# EAGLE board dosimeter (EAGLE 6.1)
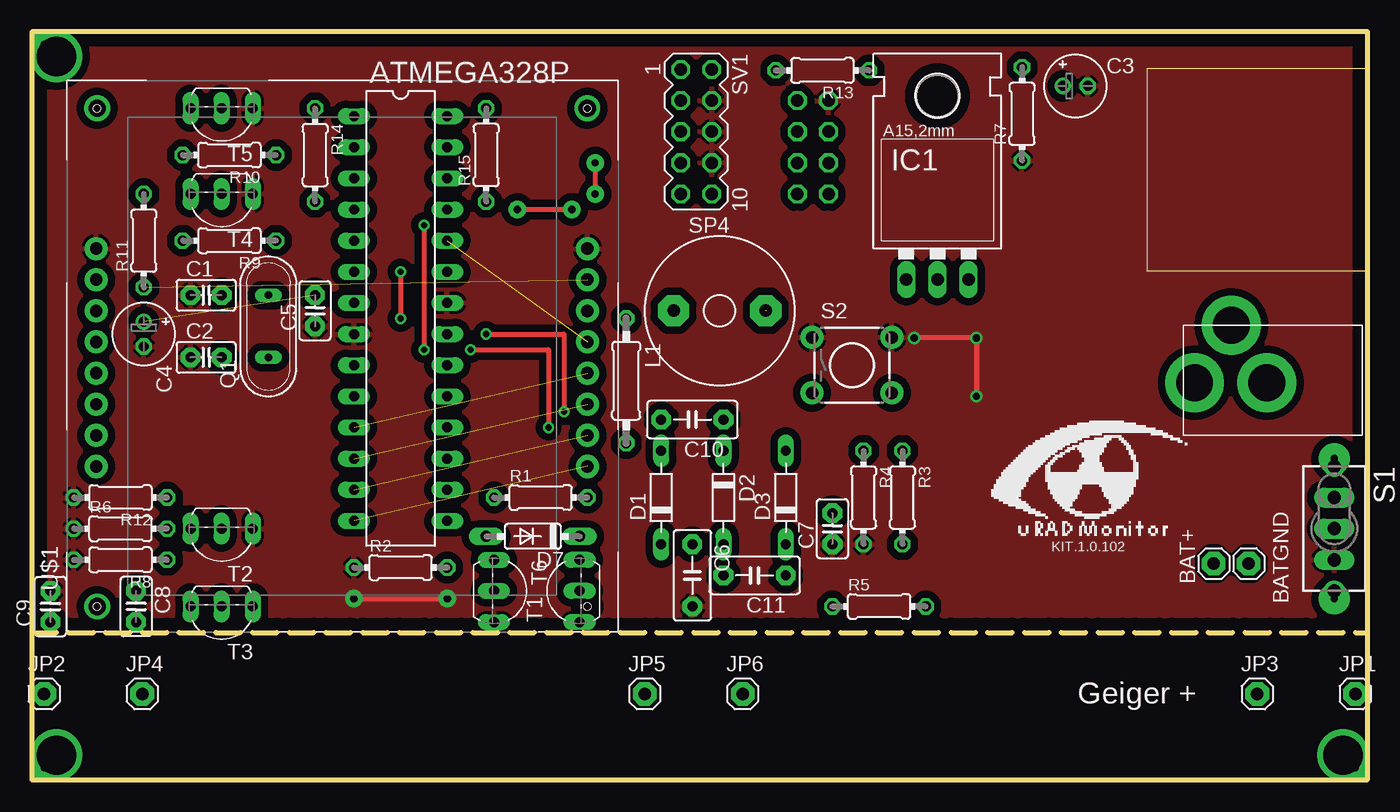
[diagram p0: board, top side]
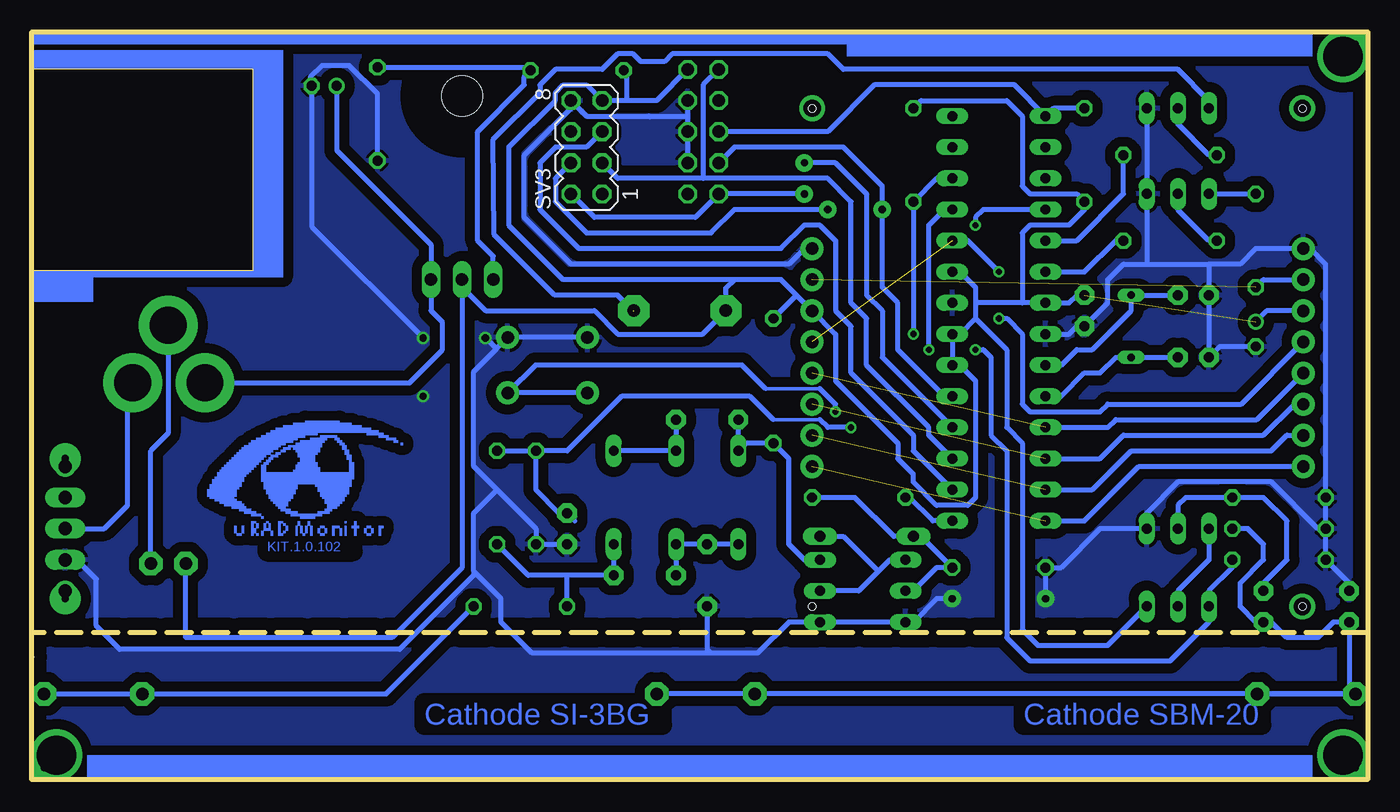
[diagram p1: board, bottom side, seen from below]

Size 109 x 61 mm. Coordinates in mm from the lower left corner, seen from the top.
Outline: 109,10 109,0 0,0 0,12
Outline: 109,10 109,12
Outline: 109,12 109,61 0,61 0,12
Outline: 0,12 109,12
Outline: 109,10 109,12
Copper layers (1*16): Top 0.035mm / dielectric 1.5mm / Bottom 0.035mm
Design rules: minimum track width 10mil, minimum drill 24mil, track to track 8mil, track to pad 8mil, pad to pad 8mil, via to via 8mil, smd to smd 8mil, copper to edge 40mil, drill to drill 8mil, minimum pad ring 10mil, minimum via ring 8mil, stop-mask expansion 4mil, vias tented up to drill 0mil, thermal gap 10mil
Milling: area 91,41.5 to 109,58

## Footprints (pad centres in the part's own frame; a part is rotated, then mirrored left to right if it is on the bottom)
DIL28-3 = drill 0.813 long: 1 -16.51,-3.81; 2 -13.97,-3.81; 3 -11.43,-3.81; 4 -8.89,-3.81; 5 -6.35,-3.81; 6 -3.81,-3.81; 7 -1.27,-3.81; 8 1.27,-3.81; 9 3.81,-3.81; 10 6.35,-3.81; 11 8.89,-3.81; 12 11.43,-3.81; 13 13.97,-3.81; 14 16.51,-3.81; 15 16.51,3.81; 16 13.97,3.81; 17 11.43,3.81; 18 8.89,3.81; 19 6.35,3.81; 20 3.81,3.81; 21 1.27,3.81; 22 -1.27,3.81; 23 -3.81,3.81; 24 -6.35,3.81; 25 -8.89,3.81; 26 -11.43,3.81; 27 -13.97,3.81; 28 -16.51,3.81
1X01 = drill 1.016 pad 1.93 octagon: 1 0,0
C2.5-2 = drill 0.813 pad 1.6 octagon: 1 -1.27,0; 2 1.27,0
E2-5 = drill 0.813 pad 1.27: + -1.016,0 | drill 0.813 pad 1.27 octagon: - 1.016,0
C5B3 = drill 0.813 pad 1.6 octagon: 1 -2.54,0; 2 2.54,0
D-7.5 = drill 0.813 long: A 3.81,0; C -3.81,0
DO35-7 = drill 0.9 long: A 3.81,0; C -3.81,0
317TL = drill 1.016 long: 1 -2.54,-3.81; 2 0,-3.81; 3 2.54,-3.81 | hole 3.302: 0,11.176
0207/10 = drill 0.813 octagon: 1 -5.08,0; 2 5.08,0
QS = drill 0.61 long: 1 -2.54,0; 2 2.54,0
0204/7 = drill 0.813 octagon: 1 -3.81,0; 2 3.81,0
TL3XYO = drill 1.1 pad 1.422 long: 1 -2.54,0; 2 0,0; 3 2.54,0 | drill 1.1 pad 1.676: M1 -5.08,0; M2 5.08,0
TACTILE-PTH = drill 1.016 pad 1.88: 1 -3.251,2.261; 2 3.251,2.261; 3 -3.251,-2.261; 4 3.251,-2.261
AL60P = drill 1.016 pad 2.54 octagon: 1 -3.759,0; 2 3.759,0
MA05-2 = drill 1.016 octagon: 1 -5.08,-1.27; 2 -5.08,1.27; 3 -2.54,-1.27; 4 -2.54,1.27; 5 0,-1.27; 6 0,1.27; 7 2.54,-1.27; 8 2.54,1.27; 9 5.08,-1.27; 10 5.08,1.27
MA04-2 = drill 1.016 octagon: 1 -3.81,-1.27; 2 -3.81,1.27; 3 -1.27,-1.27; 4 -1.27,1.27; 5 1.27,-1.27; 6 1.27,1.27; 7 3.81,-1.27; 8 3.81,1.27
TO92-EBC-OVAL = drill 0.813 long: B 0,-1.27; C 2.54,-1.27; E -2.54,-1.27
TO92-EBC = drill 0.813 long: B 0,-1.27; C 2.54,-1.27; E -2.54,-1.27
NOKIA5110 = drill 1.016 pad 1.88: B1 -0.01,0; B2 2.53,0; B3 5.07,0; B4 7.61,0; B5 10.15,0; B6 12.69,0; B7 15.23,0; B8 17.77,0; T1 -0.01,40.08; T2 2.53,40.08; T3 5.07,40.08; T4 7.61,40.08; T5 10.15,40.08; T6 12.69,40.08; T7 15.23,40.08; T8 17.77,40.08 | hole 0.6: -11.43,0; 29.21,0; -11.43,40.005; 29.21,40.005
PJ-102A = drill 3 pad 4.8: RING 0.1,-3.39; RING_SW -4.6,-6.29; TIP 0.1,-9.29

## Placement (x,y rotation side)
ATMEGA328P  ATMEGA328P  [DIL28-3]  30.09,37.62 270 top
BAT+  [1X01]  96.44,17.62 0 top
BATGND  [1X01]  99.3,17.62 0 top
C1  33p  [C2.5-2]  14.21,39.53 0 top
C2  33p  [C2.5-2]  14.21,34.45 0 top
C3  22uF 50V  [E2-5]  85.15,56.59 0 top
C4  47uF 16V  [E2-5]  9.13,36.35 270 top
C5  100nF  [C2.5-2]  23.1,38.26 90 top
C6  10nF/1KV  [C5B3]  53.9,16.67 270 top
C7  15nF  [C2.5-2]  65.33,20.48 90 top
C8  33p  [C2.5-2]  8.49,14.13 270 top
C9  33pF  [C2.5-2]  1.51,14.13 90 top
C10  10nF/1KV  [C5B3]  53.9,29.37 180 top
C11  10nF/1KV  [C5B3]  58.98,16.67 180 top
D1  BYV26E  [D-7.5]  51.36,23.02 90 top
D2  BYV26E  [D-7.5]  56.44,23.02 270 top
D3  BYV26E  [D-7.5]  61.52,23.02 90 top
D7  1N4148DO35-7  [DO35-7]  40.88,19.84 180 top
IC1  [317TL]  73.9,44.61 0 top
JP1  [1X01]  108,7 0 top
JP2  [1X01]  1,7 0 top
JP3  [1X01]  100,7 0 top
JP4  [1X01]  9,7 0 top
JP5  [1X01]  50,7 0 top
JP6  [1X01]  58,7 0 top
L1  2.2mH  [0207/10]  48.5,32.55 270 top
Q1  8Mhz  [QS]  19.29,36.99 90 top
R1  100  [0204/7]  41.52,23.02 0 top
R2  10K  [0204/7]  30.09,17.3 0 top
R3  10M 1%  [0204/7]  71.04,23.02 270 top
R4  47K 1%  [0204/7]  67.87,23.02 270 top
R5  10M  [0204/7]  69.14,14.13 0 top
R6  220K  [0204/7]  7.23,20.48 0 top
R7  3K  [0204/7]  80.8,54.32 90 top
R8  10K  [0204/7]  7.23,17.94 180 top
R9  100  [0204/7]  16.11,43.97 180 top
R10  100  [0204/7]  16.11,50.96 180 top
R11  100  [0204/7]  9.13,43.97 90 top
R12  100K  [0204/7]  7.23,23.02 180 top
R13  2.2K  [0204/7]  64.51,57.86 180 top
R14  10K  [0204/7]  23.1,50.96 270 top
R15  10K  [0204/7]  37.07,50.96 90 top
S1  TL32YO  [TL3XYO]  106.28,20.48 270 top
S2  [TACTILE-PTH]  66.92,33.81 0 top
SP4  SPEAKER/AL60P  [AL60P]  56.12,38.26 0 top
SV1  isp  [MA05-2]  54.21,52.86 270 top
SV3  ethernet  [MA04-2]  63.74,51.59 90 bottom
T1  MPSA42  [TO92-EBC-OVAL]  43.42,15.4 90 top
T2  2N2222  [TO92-EBC-OVAL]  15.48,19.21 180 top
T3  2N2907  [TO92-EBC-OVAL]  15.48,12.86 180 top
T4  2n2222  [TO92-EBC]  15.48,46.52 180 top
T5  2n2222  [TO92-EBC]  15.48,53.5 180 top
T6  2N2907  [TO92-EBC-OVAL]  38.98,15.4 270 top
U$1  NOKIA5110  [NOKIA5110]  45.33,25.56 90 top
U$2  2.1MMJACKTHM  [PJ-102A]  104.17,32.48 270 top

## Library data of the parts
ATMEGA328P = atmel; OC_FARNELL: unknown; OC_NEWARK: unknown
BAT+ BATGND JP1-JP6 SP4 T1-T3 T6 U$2 = adafruit
C1 C2 C5-C11 = capacitor-wima
C3 C4 = resistor
D1-D3 = diode
D7 = Diode2
IC1 = v-reg
L1 R1-R15 = rcl
Q1 = special
S1 = switch
S2 = sparkfun-electromechanical
SV1 SV3 = con-lstb; OC_FARNELL: unknown; OC_NEWARK: unknown
T4 T5 = transistor-neu-to92
U$1 = NOKIA5110_OK

## Nets
GND: ATMEGA328P.8 ATMEGA328P.22 C1.1 C2.1 C3.- C4.- C5.1 C6.2 C7.1 C9.2 R2.1 R4.2 R6.1 R7.1 R8.2 R12.2 S1.3 S2.1 S2.2 SV1.4 SV1.6 SV1.8 SV3.8 T1.E T2.E T4.E T5.E T6.C U$1.B8 U$1.T8
N$1: ATMEGA328P.9 C1.2 Q1.2
N$2: ATMEGA328P.10 C2.2 Q1.1
N$3: R11.2 T4.C
N$4: ATMEGA328P.17 SV1.1 SV3.3
N$5: ATMEGA328P.16 SV3.5
N$6: ATMEGA328P.18 SV1.9 SV3.2
N$7: R9.2 T4.B
N$8: ATMEGA328P.19 SV1.7 SV3.4
N$9: R11.1 U$1.B7 U$1.T7
N$10: C10.2 D1.A L1.2 T1.C
N$11: ATMEGA328P.1 R14.1 SV1.5
N$13: ATMEGA328P.24 U$1.B5 U$1.T5
N$14: ATMEGA328P.26 R15.1 S2.3 S2.4
N$15: S1.2 U$2.RING
N$16: C10.1 D2.C D3.A
N$18: JP1.1 JP3.1 R5.2
N$20: BATGND.1 U$2.RING_SW
N$21: ATMEGA328P.11 U$1.B4 U$1.T4
N$22: ATMEGA328P.12 U$1.B3 U$1.T3
N$23: ATMEGA328P.13 U$1.B2 U$1.T2
N$24: ATMEGA328P.14 U$1.B1 U$1.T1
N$25: ATMEGA328P.7 ATMEGA328P.20 ATMEGA328P.21 ATMEGA328P.23 BAT+.1 C4.+ C5.2 IC1.2 L1.1 R13.2 R14.2 R15.2 SP4.1 SV1.2 SV3.7 T3.E U$1.B6 U$1.T6
N$26: ATMEGA328P.15 R1.1
N$27: D7.A R1.2 R2.2 T6.B
N$28: C3.+ IC1.3 U$2.TIP
N$30: C6.1 C11.2 D1.C D2.A
N$31: C11.1 D3.C R3.2 R5.1
N$34: ATMEGA328P.6 R9.1
N$40: SP4.2 T5.C
N$41: R10.2 T5.B
N$42: ATMEGA328P.5 R10.1
N$48: IC1.1 R7.2 R13.1
N$52: C8.2 C9.1 JP2.1 JP4.1 JP5.1 JP6.1 R6.2
N$54: ATMEGA328P.25 C7.2 R3.1 R4.1
N$56: C8.1 R12.1 T2.B
N$59: T2.C T3.B
N$60: ATMEGA328P.4 R8.1 T3.C
N$74: D7.C T1.B T6.E

## Tracks (layer width: path | path; a pad name or v marks a point on that pad's centre or on a via)
GND  (via drill 0.6, 0.6 pad 1.42)
  Top 0.406: v26.27,14.77 v33.89,14.77 | v72,36.04 v77.08,36.04 v77.08,31.27
  Bottom 0.406: ATMEGA328P.8 24.37,36.35 23.73,36.99 C5.1 21.2,38.89 21.2,40.8 19.93,42.07 18.02,42.07 | T5.E T4.E 18.02,42.07 | 12.94,42.07 C1.1 C2.1 12.05,35.34 C4.- | 18.02,42.07 12.94,42.07 | SV1.4 55.48,54.13 | 55.48,54.13 SV1.6 SV1.8 | 58.66,54.13 63.74,54.13 SV3.8 65.01,54.77 68.82,50.96 68.82,45.88 65.01,42.07 47.23,42.07 45.97,43.33 U$1.B8 | 58.66,54.13 55.48,54.13 | 12.94,42.07 10.4,42.07 9.13,43.34 5.25,43.34 U$1.T8 4.69,43.34 3.42,42.07 R6.1 | C9.2 1.51,16.03 R8.2 R6.1 | R6.1 R12.2 | R6.1 4.05,20.48 7.86,24.29 15.48,24.29 18.02,21.75 T2.E 21.83,20.48 25,17.3 R2.1 v26.27,14.77 | 72.95,16.99 70.72,14.77 70.72,12.86 68.19,10.32 53.58,10.32 | C7.1 R4.2 67.87,20.48 71.04,23.65 | v33.89,14.77 35.16,14.77 37.07,12.86 T6.C T1.E 47.23,12.86 49.77,10.32 53.58,10.32 | 71.04,23.65 72.95,25.56 72.95,33.29 71.1,35.14 | 58.58,54.05 58.66,54.13 | C6.2 53.9,10.64 53.58,10.32 | 72.95,16.99 72.95,21.75 71.04,23.65 | 71.1,35.14 S2.2 | S2.1 70.05,36.08 70.09,36.04 | 72.95,16.99 72.95,16.67 78.98,10.64 101.84,10.64 103.75,12.54 103.75,16.35 105.33,17.94 S1.3 | R7.1 80.8,55.96 83.11,58.26 85.33,58.26 86.28,57.31 | C3.- 86.16,45.13 v77.08,36.04 | v72,36.04 71.1,35.14
  pour Top (isolate 0.61): 0,61 109,61 109,12 0,12
  pour Bottom (isolate 0.813): 0,61 109,61 109,0 0,0
N$1
  Bottom 0.406: C1.2 Q1.2 19.29,38.26 22.47,35.08 23.73,35.08 25,33.81 ATMEGA328P.9
N$2
  Bottom 0.406: C2.2 Q1.1 20.56,34.45 21.83,33.18 23.1,33.18 25,31.27 ATMEGA328P.10
N$3
  Bottom 0.406: T4.C R11.2
N$4
  Bottom 0.406: ATMEGA328P.17 35.8,28.1 35.8,28.73 40.88,33.81 40.88,37.62 42.15,38.89 42.15,47.15 44.06,49.05 54.21,49.05 | SV1.1 54.21,56.67 54.21,49.05 | 54.21,49.05 61.2,49.05 SV3.3
N$5
  Bottom 0.406: SV3.5 63.74,51.59 66.28,51.59 67.55,50.32 67.55,46.52 64.38,43.34 47.87,43.34 45.96,45.24 44.69,45.24 43.42,43.97 43.42,38.26 42.15,36.99 42.15,33.18 37.07,28.1 37.07,26.83 ATMEGA328P.16 34.53,23.65
N$6  (via drill 0.6 pad 1.42)
  Top 0.406: v45.96,50.32 v45.96,47.78
  Bottom 0.406: SV3.2 63.1,45.88 54.85,45.88 SV1.9 v45.96,47.78 | 34.53,28.73 ATMEGA328P.18 39.61,34.45 39.61,38.26 40.88,39.53 40.88,47.78 43.42,50.32 v45.96,50.32
N$7
  Bottom 0.406: R9.2 12.94,43.97 15.48,46.52 T4.B
N$8  (via drill 0.6 pad 1.42)
  Top 0.406: v44.06,46.52 v39.61,46.52
  Bottom 0.406: SV3.4 66.28,49.05 66.28,47.15 63.74,44.61 53.58,44.61 51.67,46.52 v44.06,46.52 | ATMEGA328P.19 34.53,31.27 38.34,35.08 38.34,38.89 39.61,40.16 v39.61,46.52 39.61,48.42 42.78,51.59 51.67,51.59 SV1.7
N$9  (1 unrouted)
  Bottom 0.406: R11.1 8.49,40.8 5.25,40.8 U$1.T7
N$10
  Bottom 0.406: T1.C 45.96,17.94 47.23,19.21 47.23,26.2 L1.2 50.72,27.46 D1.A C10.2
N$11
  Bottom 0.406: R14.1 25.64,54.77 ATMEGA328P.1 28.81,56.67 40.24,56.67 44.06,52.86 SV1.5
N$13  (via drill 0.5 pad 0.25)  (1 unrouted)
  Top 0.406: v30.09,41.44 v30.09,37.62
  Bottom 0.406: v30.09,37.62 29.45,37.62 28.18,36.35 28.18,30.64 27.54,30 21.83,30 21.2,30.64 10.32,30.64 U$1.T5 5.25,35.72 | v30.09,41.44 32.63,43.97 ATMEGA328P.24
N$14  (via drill 0.5 pad 0.25)
  Top 0.406: v37.07,36.35 43.42,36.35 v43.42,30
  Bottom 0.305: 44.69,31.91 49.13,31.91
  Bottom 0.406: ATMEGA328P.26 35.16,49.05 R15.1 v37.07,36.35 | 49.13,31.91 51.04,33.81 67.91,33.81 S2.4 S2.3 | v43.42,30 43.42,30.64 44.69,31.91
N$15
  Bottom 0.406: S1.2 103.11,20.48 101.2,22.38 101.2,31.96 U$2.RING
N$16
  Bottom 0.406: C10.1 D2.C D3.A
N$17  (via drill 0.6 pad 2.54)
  other vias: 106.28,26.2
N$18
  Bottom 0.406: JP1.1 JP3.1 80.08,7 R5.2
N$19  (via drill 1.4)
  other vias: 5.32,14.13
N$20
  Bottom 0.406: BATGND.1 99.3,26.83 97.89,28.24 U$2.RING_SW
N$21  (1 unrouted)
  Bottom 0.406: ATMEGA328P.11 21.2,28.73 20.56,29.37 9.05,29.37 U$1.T4
N$22  (1 unrouted)
  Bottom 0.406: ATMEGA328P.12 21.83,26.2 19.93,28.1 8.49,28.1 5.95,30.64 5.25,30.64 U$1.T3
N$23  (1 unrouted)
  Bottom 0.406: ATMEGA328P.13 22.47,23.65 19.29,26.83 7.86,26.83 6.59,28.1 5.25,28.1 U$1.T2
N$24  (1 unrouted)
  Bottom 0.406: ATMEGA328P.14 23.1,21.11 18.66,25.56 5.25,25.56 U$1.T1
N$25  (1 unrouted)
  Bottom 0.406: C5.2 23.73,39.53 24.37,38.89 ATMEGA328P.7 28.18,38.89 | ATMEGA328P.23 33.26,41.44 31.99,40.16 31.99,38.89 | 28.18,38.89 31.99,38.89 | 31.99,38.89 31.99,37.62 | 31.99,37.62 33.26,36.35 ATMEGA328P.21 ATMEGA328P.20 33.26,33.81 31.99,32.55 31.99,23.02 32.63,22.38 35.16,22.38 37.07,24.29 37.07,24.92 38.34,26.2 38.34,27.46 43.42,32.55 43.42,36.35 U$1.B6 | 60.56,55.41 58.02,55.41 SV1.2 | 60.56,55.41 SV3.7 63.74,56.67 65.64,56.67 66.28,56.04 66.28,55.41 70.09,51.59 70.09,45.24 65.64,40.8 51.67,40.8 | 31.99,37.62 29.45,35.08 29.45,28.73 28.18,27.46 28.18,12.22 26.91,10.95 21.2,10.95 T3.E | U$1.B6 | U$1.B6 | U$1.B6 46.59,39.53 | 46.59,39.53 47.87,40.8 51.67,40.8 | U$1.T6 8.25,38.25 C4.+ | 28.18,38.89 28.18,44.61 27.54,45.24 24.37,45.24 23.1,46.52 R14.2 23.73,47.78 27.54,47.78 28.18,48.42 28.18,54.13 29.45,55.41 36.44,55.41 R15.2 | 51.67,40.8 52.36,40.11 SP4.1 54.27,36.35 61.2,36.35 63.1,38.26 72,38.26 73.9,40.16 | L1.1 46.59,39.53 | 73.9,40.16 IC1.2 | R13.2 60.48,57.86 60.48,55.48 60.56,55.41 | 73.9,40.16 73.9,17.3 79.61,11.59 96.44,11.59 BAT+.1
N$26
  Bottom 0.406: ATMEGA328P.15 35.48,21.11 37.39,23.02 R1.1
N$27
  Bottom 0.406: T6.B 37.07,15.4 35.16,17.3 R2.2 36.44,19.84 D7.A 38.66,19.84 41.83,23.02 R1.2
N$28
  Bottom 0.406: U$2.TIP 78.19,32.38 75.49,35.08 75.49,37.31 76.44,38.26 IC1.3 76.44,43.66 84.13,51.35 C3.+
N$29  (via drill 0.6 pad 2)
  other vias: 108,1
N$30
  Bottom 0.406: D1.C C6.1 D2.A C11.2
N$31
  Bottom 0.406: D3.C C11.1 65.33,16.67 | 65.33,16.67 68.5,16.67 R3.2 | R5.1 65.33,16.67
N$34
  Bottom 0.406: ATMEGA328P.6 23.1,41.44 20.56,43.97 R9.1
N$40  (1 unrouted)
  Bottom 0.406: T5.C 12.94,55.41 15.48,57.95 42.78,57.95 44.06,59.21 56.76,59.21 57.39,58.58 59.3,58.58 59.93,59.21 61.2,59.21 62.47,57.95 66.28,57.95 67.55,56.67 67.55,56.04 71.36,52.23 71.28,44.47 66.33,39.53 61.2,39.53 59.93,38.26
N$41
  Bottom 0.406: R10.2 12.94,50.96 15.48,53.5 T5.B
N$42
  Bottom 0.406: ATMEGA328P.5 23.73,43.97 19.93,47.78 R10.1
N$44  (via drill 1.4)
  other vias: 5.32,54.77
N$45  (via drill 1.4)
  other vias: 45.33,54.77
N$46  (via drill 0.6 pad 2)
  other vias: 1,1
N$47  (via drill 0.6 pad 2)
  other vias: 1,60
N$48
  Bottom 0.406: R13.1 68.32,58.08 | IC1.1 71.36,42.7 72.63,43.97 72.63,52.86 68.82,56.67 68.82,57.36 R13.1 | R7.2 68.69,58.13 68.5,57.95 68.4,57.95 R13.1
N$49  (via drill 0.6 pad 2.54)
  other vias: 106.28,14.77
N$52
  Bottom 0.406: JP4.1 JP2.1 | R6.2 9.76,20.48 8.49,19.21 8.49,17.94 10.4,16.03 10.4,14.13 9.13,12.86 C8.2 7.86,12.86 6.59,11.59 4.05,11.59 2.78,12.86 C9.1 1.51,7.46 JP2.1 | JP2.1 JP5.1 JP6.1
N$54  (via drill 0.5 pad 0.25)
  Top 0.406: v35.8,35.08 42.15,35.08 v42.15,28.73
  Bottom 0.305: 44.69,29.37 48.5,29.37
  Bottom 0.406: R3.1 R4.1 | R4.1 67.87,23.65 65.96,21.75 C7.2 64.69,21.11 | ATMEGA328P.25 34.53,46.52 35.8,45.24 v35.8,35.08 | 48.5,29.37 50.41,31.27 60.88,31.27 65.33,26.83 R4.1 | v42.15,28.73 44.06,28.73 44.69,29.37
N$56
  Bottom 0.406: C8.1 8.49,16.03 6.59,17.94 6.59,21.11 8.49,23.02 R12.1 14.84,23.02 15.48,22.38 T2.B
N$59
  Bottom 0.406: T2.C 12.94,17.94 15.48,15.4 T3.B
N$60  (via drill 0.5 pad 0.25)
  Top 0.406: v31.99,45.24 v31.99,35.08
  Bottom 0.406: R8.1 11.04,17.3 12.94,15.4 T3.C 12.94,12.86 16.11,9.68 27.54,9.68 29.45,11.59 29.45,26.83 30.72,28.1 30.72,34.45 31.36,35.08 v31.99,35.08 | ATMEGA328P.4 31.36,46.52 31.99,45.88 v31.99,45.24
N$74
  Bottom 0.406: T6.E 38.98,17.94 39.93,16.99 | 39.93,16.99 41.52,15.4 T1.B | D7.C 42.78,19.84 39.93,16.99
N$80  (via drill 3.2 pad 3.81)
  other vias: 2,59
N$81  (via drill 3.2 pad 3.81)
  other vias: 2,2
N$82  (via drill 3.2 pad 3.81)
  other vias: 107,2
(copper drawn outside any net)
  shapes: Bottom area x212

## Text on the board
Bottom: KIT.1.0.102 | Cathode SBM-20 | Cathode SI-3BG
tPlace: KIT.1.0.102 | Geiger +